# Altium PCB OTimCon_Station.PcbDoc
Units mm, origin at the board's own origin, x right, y up, seen from the top; angles counter-clockwise.
Board outline 76 x 51 mm, 2 copper layers (L1, L2), stack 1.688 mm thick; 55 components, 42 nets, 166 pads, 5 vias.
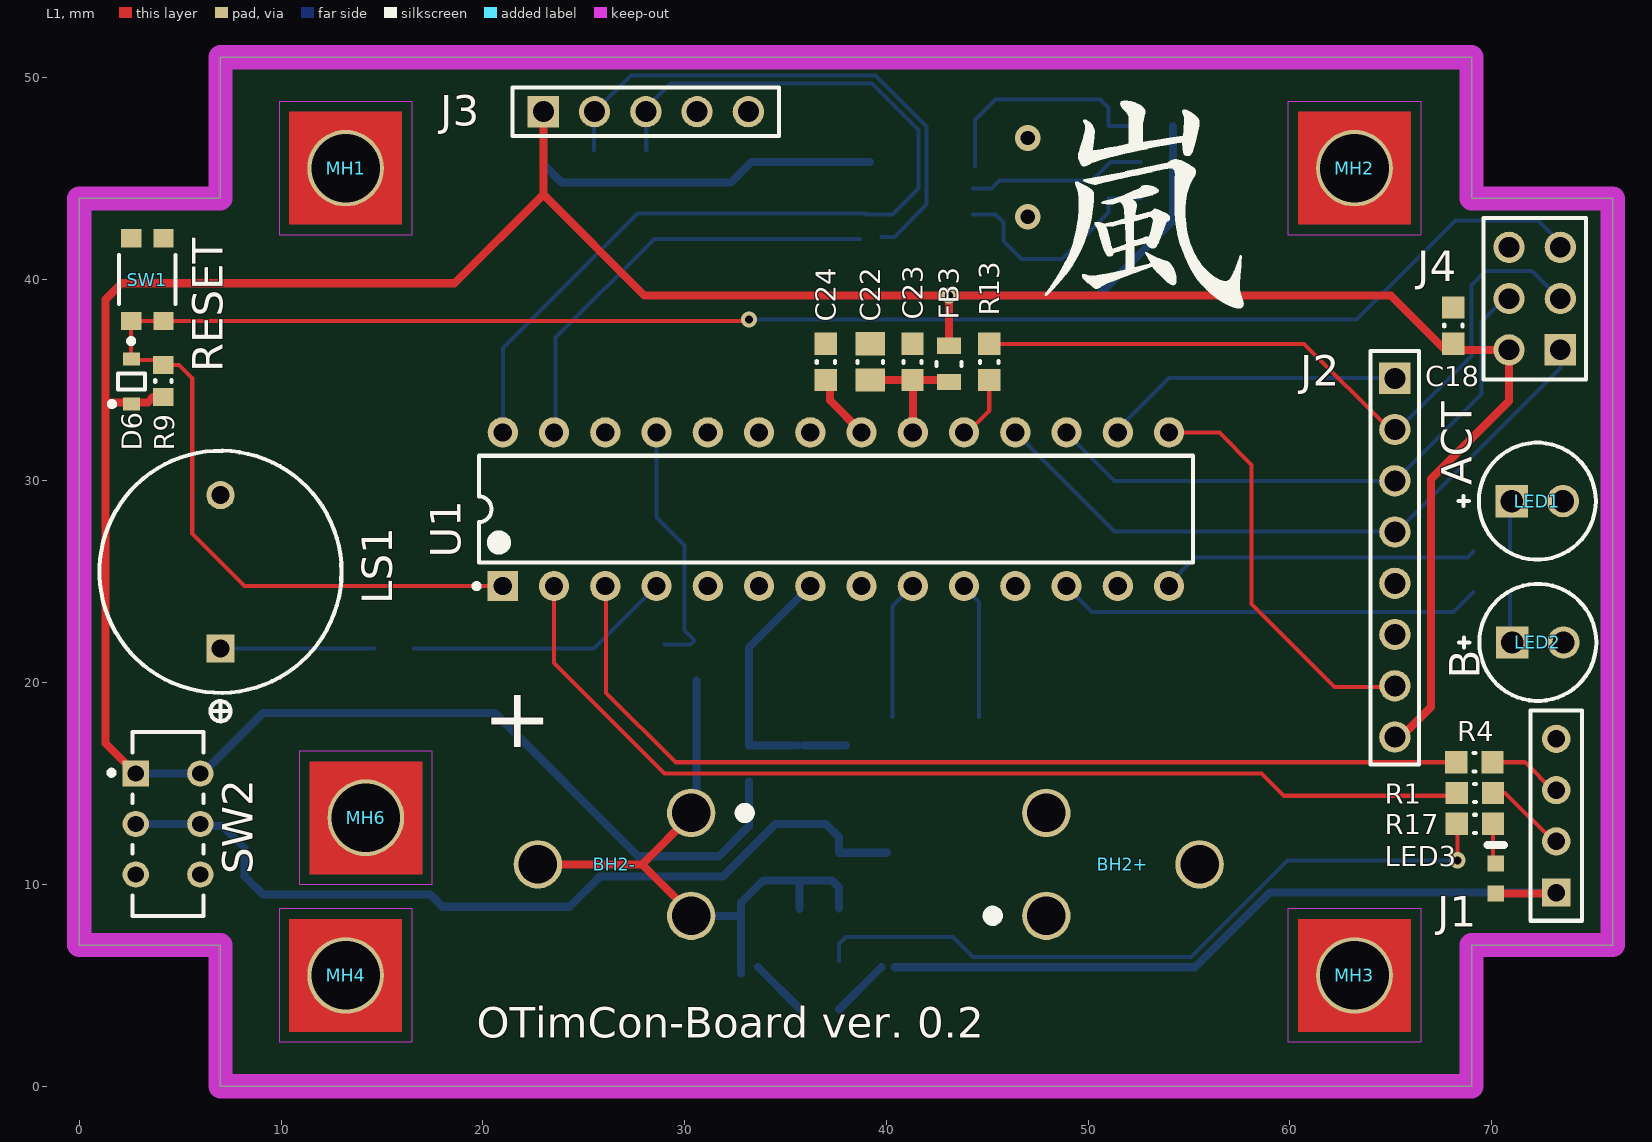
[diagram p0: L1 view]
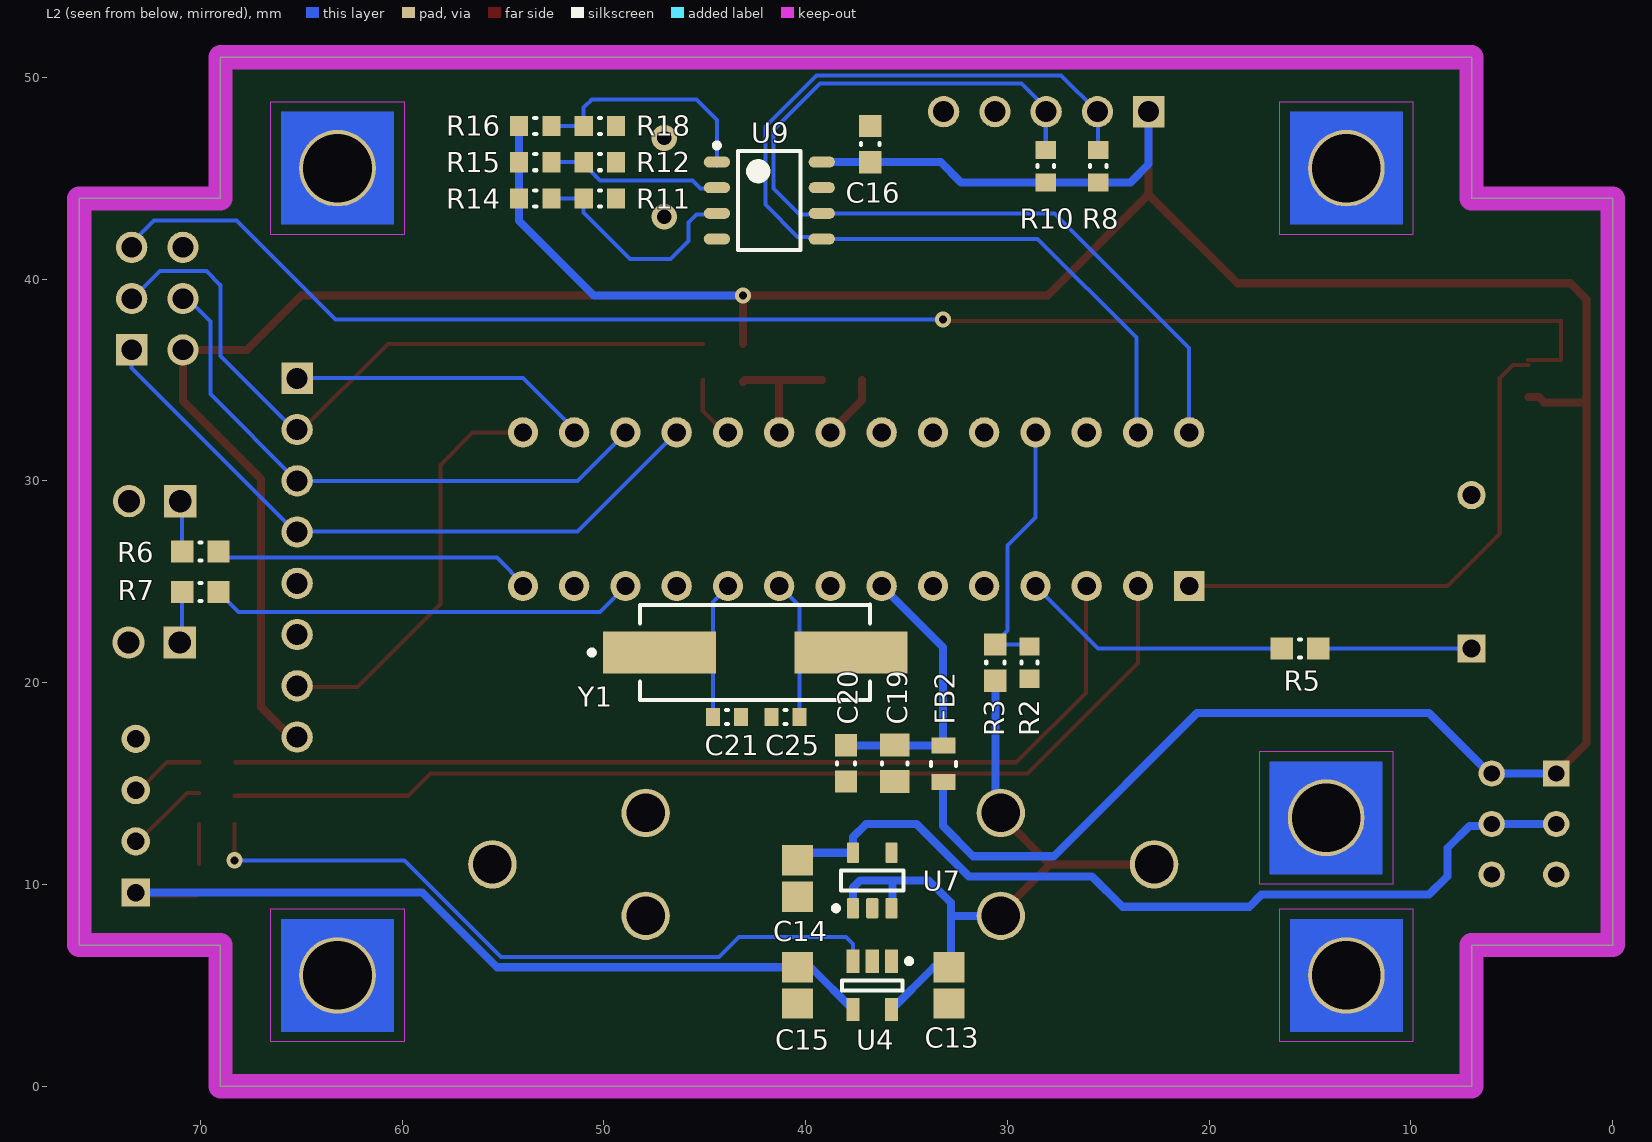
[diagram p1: L2 view, seen from below]

## Layer stack, top to bottom
Top Solder: solder mask 0.0102, Solder Resist, Dk 3.5
L1: signal copper 0.0442
Dielectric5: core 1.6, DE 104 ML, Dk 3.26
L2: signal copper 0.0442
Bottom Solder: solder mask 0.0102, Solder Resist, Dk 3.5

## Board outline
7,51 69,51 69,44 76,44 76,7 69,7 69,0 7,0 7,7 0,7 0,44 7,44

## Design rules (kind name [scope] priority, off if disabled: settings)
Clearance "Around polygons" [IsRegion] p1: gap=0.3 ignorepadtopadclearanceinfootprint=FALSE except(0: Arc-Hole Track-Hole SMDPad-Hole THPad-Hole Via-Hole Fill-Hole Poly-Hole Region-Hole Text-Hole)
Clearance [All] p2: gap=0.2 ignorepadtopadclearanceinfootprint=FALSE except(0: Arc-Hole Track-Hole SMDPad-Hole THPad-Hole Via-Hole Fill-Hole Poly-Hole Region-Hole Text-Hole)
ComponentClearance "MH2 to J2" [InComponent('MH2') vs InComponent('J2')] p1: gap=0 collisioncheckmode=3 verticalgap=0 showdistances=FALSE
ComponentClearance "DIP SOCKET to MH2 and U1" [InComponent('SCKT FOR U1') vs InComponent('MH2') or InComponent('U1')] p2: gap=0 collisioncheckmode=3 verticalgap=0 showdistances=FALSE
ComponentClearance "MH4 to FID4 and J4" [InComponent('MH4') vs InComponent('FID4') or InComponent('J4')] p3: gap=0 collisioncheckmode=3 verticalgap=0 showdistances=FALSE
ComponentClearance "Power Resistors" [InComponent('R27') vs InComponent('R28')] p4: gap=0 collisioncheckmode=3 verticalgap=0 showdistances=FALSE
ComponentClearance "SW2 and FID1" [InComponent('SW2') vs InComponent('FID1')] p5: gap=0 collisioncheckmode=3 verticalgap=0 showdistances=FALSE
ComponentClearance [All] p6: gap=0.2 collisioncheckmode=3 verticalgap=0.2 showdistances=FALSE
Height [All] p1: minheight=-8 maxheight=25.4 prefheight=12.7
HoleSize [All] p1: absolutevalues=TRUE maxlimit=10 minlimit=0.4 maxpercent=80.000 minpercent=20.000
HoleToHoleClearance [All] p1: gap=0.3 allowstackedmicrovias=TRUE
MinimumSolderMaskSliver [All] p1: minsoldermaskwidth=0.09
PlaneClearance [All] p1: clearance=0.3
PlaneConnect [All] p1: planeconnectstyle=Direct reliefexpansion=0.2 reliefentries=4 reliefconductorwidth=0.3 reliefairgap=0.2
PolygonConnect PolygonConnect_3 [All vs IsNamedPolygon('NONET_L01_P002')] p1: connectstyle=Relief reliefconductorwidth=0.254 reliefentries=4 polygonreliefangle="90 Angle" airgapwidth=0.254
PolygonConnect PolygonConnect_2 [All vs IsNamedPolygon('NONET_L02_P000')] p2: connectstyle=Relief reliefconductorwidth=0.254 reliefentries=4 polygonreliefangle="90 Angle" airgapwidth=0.254
PolygonConnect PolygonConnect_1 [All vs IsNamedPolygon('NONET_L01_P002')] p3: connectstyle=Relief reliefconductorwidth=0.254 reliefentries=4 polygonreliefangle="90 Angle" airgapwidth=0.254
PolygonConnect [All] p4: connectstyle=Direct reliefconductorwidth=0.254 reliefentries=4 polygonreliefangle="90 Angle" airgapwidth=0.254
RoutingTopology [All] p1: topology=Daisy_Balanced
RoutingVias [All] p1: holewidth=0.4 width=0.8 viastyle="Through Hole" minholewidth=0.4 minwidth=0.8 maxholewidth=0.4 maxwidth=0.8
SilkToSilkClearance [All] p1: silktosilkclearance=0.1
SilkToSolderMaskClearance SilkscreenOverComponentPads [IsPad] p1: minsilkscreentomaskgap=0.1 clearancetoexposedcopper=TRUE
SolderMaskExpansion [All] p1: expansion=0.1
Width "Width POWERS" [InNet('+*') or InNet('VPROG') or InNet('GND') or InNet('VBLION')] p1: maxlimit=4 minlimit=0.4 preferedwidth=0.4 minimp=50.000000 maximp=50.000000 favimp=50.000000
Width [All] p2: maxlimit=0.5 minlimit=0.2 preferedwidth=0.2 minimp=50.000000 maximp=50.000000 favimp=50.000000
20 further rules are at their usual default settings.

## Classes and differential pairs
differential pair class DIFF90: PCIE_RX PCIE_TX USB0 USB0_CON USB0_L USB1 USB1_CON USB1_L USB_MPCIE USB_MPCIE_CON USB_OTG USB_OTG_CON
differential pair class DIFF100: CSI_CLK0 CSI_D0 CSI_D1 HDMI_IN_CLK HDMI_IN_D0 HDMI_IN_D1 HDMI_IN_D2 HDMI_OUT_CLK HDMI_OUT_D0 HDMI_OUT_D1 HDMI_OUT_D2 MX0 MX1 MX2 MX3 PCIE_CLK SATA_RX SATA_TX TRD0 TRD1 TRD2 TRD3

## Components (designator, comment, footprint, x,y, rotation, side; value= is the part's Value field where it differs from the comment)
BH2+ "PCB_Clips_54" KEYSTONE-CLIPS_54-3_V 52.627,11 r90 top
BH2- "PCB_Clips_54" KEYSTONE-CLIPS_54-3_V 25.627,11 r270 top
C13 "CC0805KKX7R8BB105" CAPC2013X145X50ML20T25 32.9,5 r270 bottom
C14 "CC0805KKX7R8BB105" CAPC2013X145X50ML20T25 40.4,10.3 r270 bottom
C15 "CC0805KKX7R8BB105" CAPC2013X145X50ML20T25 40.4,5 r270 bottom
C16 "CAP 100nF 25V 0603(1608)" CAPC0603(1608)100_M 36.8,46.7 r270 bottom value=100nF
C18 "CAP 100nF 25V 0603(1608)" CAPC0603(1608)100_M 68.1,37.7 r270 top value=100nF
C19 "CAP 10uF 25V 0805(2012)" CAPC0805(2012)145_N 35.585,16.009 r90 bottom value=10uF
C20 "CAP 100nF 25V 0603(1608)" CAPC0603(1608)100_M 38,16 r90 bottom value=100nF
C21 "CAP 16pF 25V 0603(1608)" CAPC0603(1608)100_L 43.9,18.3 r0 bottom value=16pF
C22 "CAP 10uF 25V 0805(2012)" CAPC0805(2012)145_N 39.2,35.9 r270 top value=10uF
C23 "CAP 100nF 25V 0603(1608)" CAPC0603(1608)100_M 41.3,35.9 r270 top value=100nF
C24 "CAP 100nF 25V 0603(1608)" CAPC0603(1608)100_M 37,35.9 r270 top value=100nF
C25 "CAP 16pF 25V 0603(1608)" CAPC0603(1608)100_L 41,18.3 r180 bottom value=16pF
D6 "BAT54HT1G" ONSC-SOD-323-2-477-02_V 2.591,34.93 r90 top
FB2 "MPZ2012S601AT000" TDK-MPZ2012_V 33.172,15.983 r90 bottom
FB3 "MPZ2012S601AT000" TDK-MPZ2012_V 43.1,35.8 r270 top
J1 "SLW-104-01-F-S" SMTC-SLW-104-01-X-S 73.2,9.6 r90 top
J2 "SSW-108-01-G-S" SMTC-SSW-108-01-G-S 65.2,26.2 r270 top
J3 "SSW-105-01-L-S" SMTC-SSW-105-01-X-S 23,48.3 r0 top
J4 "TSW-103-08-F-D" SMTC-TSW-103-08-X-D 73.4,36.5 r90 top
LED1 "C503B-RAN-CY0B0AA2" CREE-C503B-RAN 72.263,29 r0 top
LED2 "C503B-RAN-CY0B0AA2" CREE-C503B-RAN 72.288,22 r0 top
LED3 "LTST-C190KFKT" LTST-C190KFKT_V 70.2,10.3 r90 top
LS1 "YMD-12095-G-6V" HKDZ-YMD-12095-G-2_V 7,25.5 r90 top
MH1 "Mounting Hole (Screw)" Mounting-Hole-Altium 13.2,45.5 r0 top
MH2 "Mounting Hole (Screw)" Mounting-Hole-Altium 63.2,45.5 r0 top
MH3 "Mounting Hole (Screw)" Mounting-Hole-Altium 63.2,5.5 r0 top
MH4 "Mounting Hole (Screw)" Mounting-Hole-Altium 13.2,5.5 r0 top
MH6 "Mounting Hole (Screw)" Mounting-Hole-Altium 14.2,13.31 r0 top
R1 "100R 1% 0603(1608)" RESC0603(1608)_M 69.172,14.534 r180 top value="100.00 Ohm"
R2 "10K 1% 0603(1608)" RESC0603(1608)_N 28.9,21 r90 bottom value="10000.00 Ohm"
R3 "40K2 1% 0603(1608)" RESC0603(1608)_M 30.6,21 r270 bottom value="40200.00 Ohm"
R4 "100R 1% 0603(1608)" RESC0603(1608)_M 69.147,16.061 r180 top value="100.00 Ohm"
R5 "100R 1% 0603(1608)" RESC0603(1608)_M 15.5,21.7 r0 bottom value="100.00 Ohm"
R6 "1K 1% 0603(1608)" RESC0603(1608)_M 70,26.5 r0 bottom value="1000.00 Ohm"
R7 "100R 1% 0603(1608)" RESC0603(1608)_M 70,24.5 r180 bottom value="100.00 Ohm"
R8 "10K 1% 0603(1608)" RESC0603(1608)_N 25.5,45.6 r90 bottom value="10000.00 Ohm"
R9 "10K 1% 0603(1608)" RESC0603(1608)_N 4.166,34.955 r90 top value="10000.00 Ohm"
R10 "10K 1% 0603(1608)" RESC0603(1608)_N 28.1,45.6 r90 bottom value="10000.00 Ohm"
R11 "10K 1% 0603(1608)" RESC0603(1608)_N 50.2,44 r180 bottom value=10k
R12 "10K 1% 0603(1608)" RESC0603(1608)_N 50.2,45.8 r0 bottom value=10k
R13 "22R 1% 0603(1608)" RESC0603(1608)_M 45.1,35.9 r90 top value="22.00 Ohm"
R14 "10K 1% 0603(1608)" RESC0603(1608)_N 53.4,44 r0 bottom value=10k
R15 "10K 1% 0603(1608)" RESC0603(1608)_N 53.4,45.8 r180 bottom value=10k
R16 "10K 1% 0603(1608)" RESC0603(1608)_N 53.4,47.6 r0 bottom value=10k
R17 "1K 1% 0603(1608)" RESC0603(1608)_M 69.172,13.008 r180 top value="1000.00 Ohm"
R18 "10K 1% 0603(1608)" RESC0603(1608)_N 50.2,47.6 r180 bottom value=10k
SW1 "KMR231GLFS" CKCP-KMR231GLFS 3.373,39.981 r90 top
SW2 "MS-22D18G2ROHS" DYL-MS22D18G2ROHS-6_V 4.4,13 r0 top
U1 "ATmega328P-PU" 28P3 37.5,28.6 r90 top
U4 "MAX1555EZK+" MAXM-Z5+1_M 36.7,5 r270 bottom
U7 "TPS73233DBVT" DBV0005A_N 36.7,10.2 r90 bottom
U9 "AT24C32E-SSHM-T" ATML-8S1_A_L 41.8,43.9 r180 bottom
Y1 "ABLS-11.0592MHZ-B2-T" ABRA-ABLS-11.0592MHZ-B2-T_V 42.5,21.5 r180 bottom

## Footprints (in the part's own frame and the unit in brackets; to place one, negate y for a bottom-side part, rotate by r counter-clockwise, add the part's x,y. Pads: shape width x height; smd on the part's side, far side on the other; paste and mask are expansions set on the pad)
28P3 [mm] "28-Pin Plastic Dual In-Line Package (PDIP)"
  rect 1.5x1.5 hole 0.9: 1(-3.81,16.51)
  round 1.5 hole 0.9: 2(-3.81,13.97) 3(-3.81,11.43) 4(-3.81,8.89) 5(-3.81,6.35) 6(-3.81,3.81) 7(-3.81,1.27) 8(-3.81,-1.27) 9(-3.81,-3.81) 10(-3.81,-6.35) 11(-3.81,-8.89) 12(-3.81,-11.43) 13(-3.81,-13.97) 14(-3.81,-16.51) 15(3.81,-16.51) 16(3.81,-13.97) 17(3.81,-11.43) 18(3.81,-8.89) 19(3.81,-6.35) 20(3.81,-3.81) 21(3.81,-1.27) 22(3.81,1.27) 23(3.81,3.81) 24(3.81,6.35) 25(3.81,8.89) 26(3.81,11.43) 27(3.81,13.97) 28(3.81,16.51)
  silkscreen extent -3.93,-17.7 2.65,17.93, body extent -3.6,-17.65 3.6,17.65, height 4.58
ABRA-ABLS-11.0592MHZ-B2-T_V [mm] "SMD, 2-Leads, Body 11.4x4.7mm"
  rect 5.6x2.1 smd: 1(-4.75,0) 2(4.75,0)
  silkscreen extent -8.23,-2.35 5.7,2.37, body extent -5.7,-2.35 5.7,2.35, height 4.2
ATML-8S1_A_L [mm] "SOIC, 8-Leads, Body 3.9x4.9mm, Pitch 1.27mm, IPC High Density"
  oval 1.3x0.55 smd: 1(-2.6,1.905) 2(-2.6,0.635) 3(-2.6,-0.635) 4(-2.6,-1.905) 5(2.6,-1.905) 6(2.6,-0.635) 7(2.6,0.635) 8(2.6,1.905)
  silkscreen extent -2.73,-2.45 1.55,2.85, body extent -1.95,-2.45 1.95,2.45, height 1.75
CAPC0603(1608)100_L [mm] "Chip Capacitor, Body 1.6x0.8mm, Height 1.0mm, IPC High Density"
  rect 0.7x0.9 smd: 1(-0.7,0) 2(0.7,0)
  silkscreen extent -0.05,-0.35 0.05,0.35, body extent -0.87,-0.47 0.88,0.48, height 1
CAPC0603(1608)100_M [mm] "Chip Capacitor, Body 1.6x0.8mm, Height 1.0mm, IPC Low Density"
  rect 1.1x1.1 smd: 1(-0.9,0) 2(0.9,0)
  silkscreen extent -0.05,-0.45 0.05,0.45, body extent -0.87,-0.47 0.88,0.48, height 1
CAPC0805(2012)145_N [mm] "Chip Capacitor, Body 2.0x1.2mm, Height 1.45mm, IPC Medium Density"
  rect 1.15x1.45 smd: 1(-0.9,0) 2(0.9,0)
  silkscreen extent -0.05,-0.62 0.05,0.63, body extent -1.1,-0.72 1.1,0.73, height 1.45
CAPC2013X145X50ML20T25 [mm] "Chip Capacitor, 2-Leads, Body 2.00x1.25mm, IPC Low Density"
  rect 1.5x1.55 smd: 1(-0.9,0) 2(0.9,0)
  body extent -1.1,-0.72 1.1,0.72, height 1.45
CKCP-KMR231GLFS [mm] "SMD, 4-Leads, Body 4.6x2.8mm"
  rect 0.9x1 smd: 1(-2.05,0.8) 2(-2.05,-0.8) 3(2.05,0.8) 4(2.05,-0.8)
  silkscreen extent -3.17,-1.4 1.21,1.4, body extent -2.3,-1.4 2.3,1.4, height 1.92
CREE-C503B-RAN [mm] "THD, 2-Leads, Dia 5.8mm, Pitch 2.54mm"
  rect 1.6x1.6 hole 1.1: 1(-1.27,0)
  round 1.6 hole 1.1: 2(1.27,0)
  silkscreen extent -3.9,-2.9 2.9,2.9
DBV0005A_N [mm] "SOT23, 5-Leads, Body 3.05x1.75mm, Pitch 0.95mm, IPC Medium Density"
  rrect17% 1x0.6 smd: 1(-1.375,0.95) 2(-1.375,0) 3(-1.375,-0.95) 4(1.375,-0.95) 5(1.375,0.95)
  silkscreen extent -1.5,-1.55 0.5,1.93, body extent -1.42,-1.46 1.42,1.46, height 1.08
DYL-MS22D18G2ROHS-6_V [mm] "TH, 6-Leads, Body 3.5x9.1mm, Pitch 2.5mm"
  rect 1.3x1.3 hole 0.8: 1(-1.6,2.5)
  round 1.3 hole 0.8: 2(-1.6,0) 3(-1.6,-2.5) 4(1.6,-2.5) 5(1.6,0) 6(1.6,2.5)
  silkscreen extent -2.92,-4.55 1.75,4.55, body extent -1.75,-4.55 1.75,4.55, height 5.2
HKDZ-YMD-12095-G-2_V [mm] "Buzzer, 2-Leads, Dia 12mm, Height 10mm"
  rect 1.4x1.4 hole 0.9: 1(-3.8,0)
  round 1.4 hole 0.9: 2(3.8,0)
  Mechanical 13 keep-out circle w0.1: c0,0 r6
  silkscreen extent -7.41,-6 6,6, body extent -6,-6 6,6, height 10
KEYSTONE-CLIPS_54-3_V [mm] "3-Pin Hand Drawn, Body 18.102x13.004mm"
  round 2.4 hole 1.9: 1(-2.55,4.702) 2(2.55,4.702) 3(0,-2.898)
  silkscreen extent -2.8,7.1 -2.3,7.6, body extent -9.05,-6.5 9.05,6.5, height 18
LTST-C190KFKT_V [mm] "SMD, 2-Leads, Body 1.6x0.8mm"
  rect 0.8x0.8 smd: 1(-0.75,0) 2(0.75,0)
  silkscreen extent 1.65,-0.4 1.65,0.4, body extent -0.8,-0.4 0.8,0.4, height 0.9
MAXM-Z5+1_M [mm] "SOT23, 5-Leads, Body 3x1.65mm, Pitch 0.95mm, IPC Low Density"
  rect 1.15x0.65 smd: 1(-1.2,0.95) 2(-1.2,0) 3(-1.2,-0.95) 4(1.2,-0.95) 5(1.2,0.95)
  silkscreen extent -1.32,-1.5 0.25,1.95, body extent -0.82,-1.5 0.82,1.5, height 1.1
Mounting-Hole-Altium [mm] "Mounting Hole, Altium, 3.8mm pad, 3.4mm plated hole"
  round 3.8 hole 3.4 mask+0.038: MOUNT(0,0)
  L1 region: -2.8,-2.801 2.8,-2.801 2.8,2.799 -2.8,2.799
  L1 keep-out region: -3.3,-3.299 3.3,-3.299 3.3,3.301 -3.3,3.301
  L2 region: -2.8,-2.801 2.8,-2.801 2.8,2.799 -2.8,2.799
  L2 keep-out region: -3.3,-3.299 3.3,-3.299 3.3,3.301 -3.3,3.301
ONSC-SOD-323-2-477-02_V [mm] "SOD, 2-Leads, Body 1.7x1.25mm"
  rect 0.63x0.83 smd: 1(-1.115,0) 2(1.115,0)
  silkscreen extent -1.24,-0.67 0.4,1.09, body extent -0.85,-0.63 0.85,0.63, height 1.06
RESC0603(1608)_M [mm] "Chip Resistor, Body 1.6x0.8mm, IPC Low Density"
  rect 1.1x1.1 smd: 1(-0.9,0) 2(0.9,0)
  silkscreen extent -0.05,-0.45 0.05,0.45, body extent -0.85,-0.47 0.85,0.47, height 0.6
RESC0603(1608)_N [mm] "Chip Resistor, Body 1.6x0.8mm, IPC Medium Density"
  rect 0.9x1 smd: 1(-0.8,0) 2(0.8,0)
  silkscreen extent -0.05,-0.4 0.05,0.4, body extent -0.85,-0.47 0.85,0.47, height 0.6
SMTC-SLW-104-01-X-S [mm] "Low Profile Socket Strip, 1x4 Pins, Vertical, 2.54mm Pitch, Female"
  rect 1.4x1.4 hole 0.86: 1(0,0)
  round 1.4 hole 0.86: 2(2.54,0) 3(5.08,0) 4(7.62,0)
  silkscreen extent -1.4,-1.27 9.02,1.27, body extent -1.27,-1.27 8.89,1.27, height 4.57
SMTC-SSW-105-01-X-S [mm] "SQ Post Socket, 1x5 Pins, Vertical, 2.54mm Pitch, Female"
  rect 1.55x1.55 hole 1.04: 1(0,0)
  round 1.55 hole 1.04: 2(2.54,0) 3(5.08,0) 4(7.62,0) 5(10.16,0)
  silkscreen extent -1.53,-1.2 11.69,1.2, body extent -1.52,-1.21 11.68,1.21, height 8.51
SMTC-SSW-108-01-G-S [mm] "SQ Post Socket, 1x8 Pins, Vertical, 2.54mm Pitch, Female"
  rect 1.55x1.55 hole 1.04: 1(-8.89,0)
  round 1.55 hole 1.04: 2(-6.35,0) 3(-3.81,0) 4(-1.27,0) 5(1.27,0) 6(3.81,0) 7(6.35,0) 8(8.89,0)
  silkscreen extent -10.25,-1.21 10.25,1.2, body extent -10.4,-1.21 10.42,1.21, height 8.51
SMTC-TSW-103-08-X-D [mm] ".025 SQ Post Terminal Strip Assembly, 2x3 Pins, Vertical, 2.54mm Pitch, Male"
  rect 1.55x1.55 hole 1.02: 1(0,0)
  round 1.55 hole 1.02: 2(0,2.54) 3(2.54,0) 4(2.54,2.54) 5(5.08,0) 6(5.08,2.54)
  silkscreen extent -1.46,-1.27 6.54,3.81, body extent -1.27,-1.27 6.35,3.81, height 8.38
TDK-MPZ2012_V [mm] "SMD, 2-Leads, Body 2x1.25mm"
  rect 0.8x1.2 smd: 1(-0.9,0) 2(0.9,0)
  silkscreen extent -0.1,-0.63 0.1,0.63, body extent -1,-0.63 1,0.63, height 1.05

## Part data
BH2+ BH2-: library part CMP-0466-00001-2, "PC Battery Clip, Catalog No.54, Spring Steel, Body 18.102 x 13.004 mm, THM", Manufacturer=Keystone, # of Cells=1, Cell Size=18650, ComponentLink1Description="Manufacturer URL", ComponentLink1URL=http://www.keyelco.com/, ComponentLink2Description=Datasheet, ComponentLink2URL=http://www.keyelco.com/userAssets/file/M60-2p9.pdf, Finish/Plating=Tin-Nickel, Material="Spring Steel", Mounting Technology="Through Hole", PackageDescription="3-Pin Hand Drawn, Body 18.102 x 13.004 mm", PackageReference=KEYSTONE-CLIPS_54-3, PartNumber=PCB_Clips_54, Type=CLIP
C13 C14 C15: library part CMP-2100-03605-1, "Chip Capacitor, 1 uF, 25 V, 10%, -55 to 125 degC, 0805 (2012 Metric), RoHS, Tape and Reel", Capacitance=1uF, Case/Package=0805, Case Code (Metric)=2012, Dielectric=X7R, Manufacturer=Yageo, Max Operating Temperature=125degC, Min Operating Temperature=-55degC, Package Description="2-Pin Surface Mount Device, Body 2 x 1.25 mm", Package Quantity=3000, Tolerance=10%, Voltage Rating=25V, Case Code (Imperial)=0805, Composition=Ceramic, Datasheet URL=http://www.yageo.com/documents/recent/UPY-GPHC_X7R_6.3V-to-50V_15.pdf, Datasheet Version="Rev. 15, 10/2016", Depth=1.25mm, Dissipation Factor=5%, Height=1.25mm, Lead Free=LeadFree, Length=2mm, Manufacturer URL=http://www.yageo.com/, Mount=SurfaceMount, Number of Pins=2, Package Reference=0805, Packaging=TapeandReel, Radiation Hardening=No, REACH SVHC=NoSVHC, RoHSCompliant=True, Termination=SMD/SMT, Thickness=0.057inch, Voltage Rating (DC)=25V, Width=0.049inch
C16 C18 C20 C23 C24: library part CMP-1035-02588-1, "CAP 100nF 25V ±10% 0603 (1608 Metric) Thickness 1mm SMD", Case-EIA=0603, Case-Metric=1608, Rated Voltage="25 V", Tolerance=±10%, Max Thickness="1 mm", Technology=SMT
C19 C22: library part CMP-1036-04932-1, "CAP 10uF 25V ±10% 0805 (2012 Metric) Thickness 1.45mm SMD", Case-EIA=0805, Case-Metric=2012, Rated Voltage="25 V", Tolerance=±10%, Max Thickness="1.45 mm", Technology=SMT
C21 C25: library part CMP-1035-00712-1, "CAP 16pF 25V ±10% 0603 (1608 Metric) Thickness 1mm SMD", Case-EIA=0603, Case-Metric=1608, Rated Voltage="25 V", Tolerance=±10%, Max Thickness="1 mm", Technology=SMT
D6: library part CMP-1055-00462-1, "Schottky Barrier Diode, 2-Pin SOD-323, Pb-Free, Tape and Reel", Manufacturer="On Semiconductor", ComponentLink1Description="Manufacturer URL", ComponentLink1URL=http://www.onsemi.com/, ComponentLink2Description=Datasheet, ComponentLink2URL=http://www.onsemi.cn/pub_link/Collateral/BAT54HT1-D.PDF, ComponentLink3Description="Package Specification", ComponentLink3URL=http://www.onsemi.com/pub_link/Collateral/477-02.PDF.1, Configuration=Single, DatasheetVersion="Rev. 6", IFSM Max (A)=0.6, Mounting Technology="Surface Mount", PackageDescription="2-Pin SOD, Body 1.7 x 1.25 mm", PackageReference=SOD-323-2-477-02, PackageVersion="Rev. H, 03/2007", Packing="Tape and Reel", PartNumber=BAT54HT1G, RoHS=TRUE, trr Max (ns)=5
FB2 FB3: library part CMP-2000-05401-1, "Chip Bead, 0.1 Ohm, 2 A, -55 to 125 degC, 2-Pin SMD (0805), RoHS, Tape and Reel", Current Rating=2A, DC Resistance (DCR)=100mOhmMax, Impedance @ Frequency=600Ohm@100MHz, Manufacturer=TDK, Package / Case=0805(2012Metric), Package Description="2-Pin Surface Mount Device, Body 2 x 1.25 mm", Package Reference=805, PCN Part Number=MMZ,MPSSeriesOct/2014, Standard Package=1, Catalog Drawings="(MMZ,MPZ)2012SeriesTop /  / (MMZ,MPZ)2012SeriesFootprint /  / (MMZ,MPZ)2012SeriesSide", Category=Filters, Datasheet URL=http://datasheet.octopart.com/MPZ2012S601AT000-TDK-datasheet-12512619.pdf, Datasheet Version=Sep-12, Family=FerriteBeadsandChips, Filter Type=DifferentialMode-Single, Height (Max)="0.041\"(1.05mm)", Manufacturer URL=http://www.tdk.com/, Mounting Type=SurfaceMount, Online Catalog=MPZ2012Series, Other Names=445-2206-6, Packaging=Digi-Reel, Product Training Modules=EMCComponents, Series=MPZ, Size / Dimension="0.079\"Lx0.049\"W(2.00mmx1.25mm)"
J1: library part CMP-1023-00132-1, "Low Profile Socket Strips, Through-hole, Vertical, -55 to 125 degC, 2.54 mm Pitch, 4-Pin, Female, RoHS", Manufacturer=Samtec, Temperature Range="-55 to 125 degC", ComponentLink1Description="Manufacturer URL", ComponentLink1URL=http://www.samtec.com, ComponentLink2Description=Datasheet, ComponentLink2URL=http://www.samtec.com/documents/webfiles/pdf/SLW.PDF, ComponentLink3Description="Package Specification", ComponentLink3URL=http://www.samtec.com/documents/webfiles/cpdf/SLW-1XX-01-X-X-MKT.pdf, DatasheetVersion=F-214, Mounting Technology=Through-hole, Orientation=Vertical, PackageDescription="Low Profile Socket Strip", PackageReference=SLW-104-01-X-S, PackageVersion="X, 9/1987", PartNumber=SLW-104-01-F-S, Pitch="2.54 mm", RoHS=True
J2: library part CMP-1272-00001-1, "SOCKET, Through-hole, Vertical, -55 to 125 degC, 2.54 mm Pitch, 8-Pin Female, RoHS", Manufacturer=Samtec, Operating Temperature Range="-55 to 125 degC", ComponentLink1Description="Manufacturer URL", ComponentLink1URL=http://www.samtec.com/, ComponentLink2Description=Datasheet, ComponentLink2URL=http://www.samtec.com/documents/webfiles/cpdf/SSW-1XX-XX-XXX-X-XX-XXX-XX-MKT.pdf, ComponentLink3Description="Package Specification", ComponentLink3URL=http://www.samtec.com/documents/webfiles/cpdf/SSW-S.PDF, Contact Finish=Gold, Contact Type="Female Socket", DatasheetVersion="Rev. CA", Mounting Technology="Through Hole", Number of Positions=8, Number of Rows=1, Orientation=Vertical, PackageDescription="1x8 Pins SQ Post Socket, Vertical, Body 20.5 x 2.41 mm, Pitch 2.54 mm, Female", PackageVersion="Rev. A", Packing=Bulk, PartNumber=SSW-108-01-G-S, Pitch="2.54 mm", RoHS=TRUE, Termination=Through-hole
J3: library part CMP-1023-00347-1, "SQ Post Socket, Through-hole, Vertical, -55 to 125 degC, 2.54mm Pitch, 5-Pin, Female, RoHS", Manufacturer=Samtec, Temperature Range="-55 to 125 degC", ComponentLink1Description="Manufacturer URL", ComponentLink1URL=http://www.samtec.com, ComponentLink2Description=Datasheet, ComponentLink2URL=http://www.samtec.com/documents/webfiles/pdf/SSW_TH.PDF, ComponentLink3Description="Package Specification", ComponentLink3URL=http://www.samtec.com/documents/webfiles/cpdf/SSW-1XX-XX-XXX-X-XX-XXX-XX-MKT.pdf, DatasheetVersion=F-214, Mounting Technology=Through-hole, Orientation=Vertical, PackageDescription="Assembly, Socket Strip .016 X .031 Tail", PackageReference=SSW-105-01-X-S, PackageVersion="CA, 6/1987", PartNumber=SSW-105-01-L-S, Pitch="2.54 mm", RoHS=True
J4: library part CMP-1024-00337-1, "0.025\" SQ Post Header, Through-hole, Vertical, -55 to 125 degC, 2.54 mm Pitch, 6-Pin, Male, RoHS", Manufacturer=Samtec, Temperature Range="-55 to 125 degC", ComponentLink1Description="Manufacturer URL", ComponentLink1URL=http://www.samtec.com, ComponentLink2Description=Datasheet, ComponentLink2URL=http://www.samtec.com/documents/webfiles/pdf/TSW_TH.PDF, ComponentLink3Description="Package Specification", ComponentLink3URL=http://www.samtec.com/documents/webfiles/cpdf/TSW-XXX-XX-XXX-X-XX-XXX-MKT.pdf, DatasheetVersion=F-214, Mounting Technology=Through-hole, Orientation=Vertical, PackageDescription=".025[0.64] SQ. Post Terminal Strip Assembly", PackageReference=TSW-103-08-X-D, PackageVersion="DM, 8/1988", PartNumber=TSW-103-08-F-D, Pitch="2.54 mm", RoHS=True
LED1 LED2: library part CMP-2000-06058-1, "Cree(R) 5-mm Red Round LED, 2.1 V, -40 to 100 degC, 2-Pin THD, RoHS, Ammo", Emitting Color=Red, Forward Current=50mA, Forward Voltage=2.6V, Manufacturer=Cree, Operating Temperature Classification=Industrial, Operating Temp Range=-40Cto100C, Package Description="2-Pin Through Hole Device, Dia 5.8 mm, Pitch 2.54 mm", Package Reference=C503B-RAN, Package Type=T-13/4, Power Dissipation=130mW, Reverse Voltage=5V, Test Current (It)=20mA, Datasheet URL=http://www.cree.com/sitecore-modules/web/~/media/Files/Cree/LED-Components-and-Modules/HB/Data-Sheets/C503B-RAS-RAN-AAS-AAN-RBS-RBN-ABS-ABN-RCS-RCN-ACS-ACN-1079.pdf, Datasheet Version=12/2014, Dominant Wave Length=624nm, Lens Dimensions=5x5x7.8mm, Luminous Intensity=12000mcd, Main Category=StandardLED, Manufacturer URL=http://www.cree.com/, Mounting=ThroughHole, Mounting Technology=ThroughHole, Number of  Elements=1, Packaging=AmmoPack, Pin Count=2, Product Depth (mm)=5.8mm, Product Height (mm)=8.8mm, Product Length (mm)=5.8mm, Shape Type=Circular, Type=Uni-Color, Viewing Angle=15°
LED3: library part CMP-1674-00008-1, "LED Uni-Color Orange, 75 mW, 30 mA, -35 to 85 degC, 2-Pin SMD, RoHS, Tape and Reel", Case\Package=0603, Case Code (Metric)=1608, Max Operating Temperature="155 degC", Min Operating Temperature="-55 degC", Package Quantity=5000, Power Rating="100 mW", Resistance="47 kohm", Tolerance=1%, Voltage Rating="50 V", Case Code (Imperial)=0603, ComponentLink1Description="Manufacturer URL", ComponentLink1URL=http://www.us.liteon.com/, ComponentLink2Description=Datasheet, ComponentLink2URL=http://optoelectronics.liteon.com/upload/download/DS-22-99-0186/S_110_LTST-C190KFKT.pdf, DatasheetVersion="Rev. I, 09/2011", Height="0.45 mm", Length="1.6 mm", Mount="Surface Mount", PackageDescription="2-Pin Surface Mount Device, Body 1.6 x 0.8 mm", PackageReference=C190KFKT, Packaging="Tape and Reel", Pins=2, REACH SVHC="No SVHC", RoHSCompliant=true, Voltage Rating (DC)="50 V", Width="0.8 mm"
LS1: library part CMP-0912-00001-1, "Electromagnetic Active Buzzer, 6 V, 32 mA, -20 to 45 degC, 2-Pin THD, RoHS", Manufacturer="Huakai Electronic", Operating Temperature="-20 to 45 degC", Operating Voltage="4 to 8 V", Rated Current="<=32 mA", Rated Voltage="6 V", Resonant Freq="2300 +/- 300 Hz", ComponentLink1Description="Manufacturer URL", ComponentLink1URL=http://www.xhhkdz.com/, ComponentLink2Description=Datasheet, ComponentLink2URL=http://www.xhhkdz.com/product/?103_688.html, ComponentLink3Description="URL Link1", ComponentLink3URL="a°�eL…a•°a?®i1š http://www.hongyan-e.com/web/fmq011.htm", Mounting Technology="Through Hole", PackageDescription="2-Pin THD, Dia 12 mm, Height 10 mm", PackageReference=YMD-12095-G-2, PartNumber=YMD-12095-G-6V, RoHS=TRUE, Soud Output=">=85 dB"
MH1 MH2 MH3 MH4 MH6: library part Mounting-Hole-Screw, "Mounting Hole, M3 Screw"
R1 R4 R5 R7: library part CMP-1012-00397-1, "100R 0.1W 1% 0603 (1608 Metric)  SMD", Case-EIA=0603, Case-Metric=1608, Power="0.1 W", Tolerance="1 %", Technology=SMT
R2 R8 R9 R10 R11 R12 R14 R15 R16 R18: library part CMP-1012-00623-1, "10K 0.1W 1% 0603 (1608 Metric)  SMD", Case-EIA=0603, Case-Metric=1608, Power="0.1 W", Tolerance="1 %", Technology=SMT
R3: library part CMP-1012-00691-1, "40K2 0.1W 1% 0603 (1608 Metric)  SMD", Case-EIA=0603, Case-Metric=1608, Power="0.1 W", Tolerance="1 %", Technology=SMT
R6 R17: library part CMP-1012-00510-1, "1K 0.1W 1% 0603 (1608 Metric)  SMD", Case-EIA=0603, Case-Metric=1608, Power="0.1 W", Tolerance="1 %", Technology=SMT
R13: library part CMP-1012-00320-1, "22R 0.1W 1% 0603 (1608 Metric)  SMD", Case-EIA=0603, Case-Metric=1608, Power="0.1 W", Tolerance="1 %", Technology=SMT
SW1: library part CMP-2000-06516-1, "Switch Tactile, SPST, 50 mA, 32 V, -40 to 85 degC, 4-Pin SMD, RoHS, Tape and Reel", Actuator Color=N/A, Contact Rating @ Voltage=1A, Dielectric Strength=>=250Vrms, Manufacturer="C&K Components", Maximum DC Voltage Rating=32V, Minimum Insulation Resistance=>=1000MOhm, Operating Force=3N, Operating Temperature=-40to85C, Package Description="4-Pin Surface Mount Device, Body 4.6 x 2.8 mm", Actuator Length=0.5mm, Actuator Style=Button, Base Material=N/A, Body Orientation=Straight, Contact Material=Silver, Contact Plating=Silver, Datasheet URL=http://www.ck-components.com/media/1479/kmr2.pdf, Datasheet Version=06/2016, Dimension=2.8x4.6x1.9mm, ECCN=EAR99, Electrical Life=N/A, Family=KMR2, Ground Terminal=Yes, Housing Material=N/A, HTS=8536501199, Illumination Type=N/R, Manufacturer URL=http://www.ckswitches.com/, Maximum AC Voltage Rating=N/A, Mechanical Life=150000Cycles, Mounting=SurfaceMount,GullWing, Mounting Technology=SurfaceMount, Package Reference=KMR231GLFS, Packaging=TapeandReel, Part No=KMR231GLFS, Pole Throw Configuration=SPST, Product Weight=N/A, RoHS=Yes, Seal Description=N/A, Seal Location=N/A, Supplier=C&KComponents, Switch Configuration=N.O., Type=Micro-Miniature
SW2: library part CMP-2100-03658-1, "Slide Switch, 30 V, 0.3 A, -20 to 80 degC, 6-Pin THD, RoHS", Manufacturer=Deyilong, Package Description="6-Pin Through Hole Device, Body 3.5 x 9.1 mm, Pitch 2.5 mm", Package Reference=MS22D18G2ROHS, Datasheet URL=http://datasheet.octopart.com/MS-22D18-G2-ROHS-Deyilong-datasheet-62330931.pdf, Datasheet Version=41091.0, Manufacturer URL=https://dgsdyn.cn.china.cn/
U1: library part CMP-0095-00013-2, "8-bit AVR Microcontroller, 32KB Flash, 1KB EEPROM, 2KB SRAM, 28-pin PDIP, Industrial Grade (-40°C to 85°C)", ComponentLink1Description="Manufacturer URL", ComponentLink1URL=http://www.atmel.com/, ComponentLink2Description="ATmega48A/48PA/88A/88PA/168A/168PA/328/328P Datasheet", ComponentLink2URL=http://www.atmel.com/dyn/resources/prod_documents/8271.pdf, ComponentLink3Description="ATmega48A/48PA/88A/88PA/168A/168PA/328/328P Summary", ComponentLink3URL=http://www.atmel.com/dyn/resources/prod_documents/8271S.pdf, DatasheetVersion="revD, May-2011", PackageDescription="28-lead (0.300\"/7.62mm Wide) Plastic Dual Inline Package (PDIP)", PackageReference=28P3, PackageVersion="revB, Sep-2001", RevisionNote="DatasheetVersion updated. URLs added."
U4: library part CMP-0246-00651-1, "Dual-Input USB/AC Adapter 1-Cell Li+ Battery Charger, 4.2 V Charger Voltage, 0.28 A DC Charging Current, 5-Pin TSOT Package, RoHS", Manufacturer=Maxim, Operating Temperature Range="-40 to 85 degC", Package=TSOT, Charger (V)=4.2, ComponentLink1Description="Manufacturer URL", ComponentLink1URL=http://www.maximintegrated.com/, ComponentLink2Description=Datasheet, ComponentLink2URL=http://datasheets.maximintegrated.com/en/ds/MAX1551-MAX1555.pdf, ComponentLink3Description="Package Specification", ComponentLink3URL=http://pdfserv.maximintegrated.com/package_dwgs/21-0113.PDF, DatasheetVersion="Rev. 0", ICHG Typ="0.28 A", Lithium Ion Cells=1, Max Charging VIN (V)=7, Max Protected VIN (V)=7, Mounting Technology="Surface Mount", PackageDescription="5-Pin Thin SOT23, Body 2.9 x 1.6 mm, Pitch 0.95 mm", PackageReference=Z5+1, PackageVersion="Rev. D", PartNumber=MAX1555EZK+, RoHS=TRUE
U7: library part CMP-0394-00348-2, "Single Output Fast Transient Response LDO, 200 mA, Fixed 3.3 V Output, 1.7 to 5.5 V Input, with Reverse Current Protection, 5-pin SOT-23 (DBV), -40 to 85 degC, Green (RoHS & no Sb/Br)", Manufacturer="Texas Instruments", Accuracy(%)=1, Code_JEDEC=MO-178, ComponentLink1Description="Manufacturer URL", ComponentLink1URL=http://www.ti.com/, ComponentLink2Description=Datasheet, ComponentLink2URL=http://www.ti.com/general/docs/lit/getliterature.tsp?genericPartNumber=TPS73233&fileType=pdf, ComponentLink3Description="Package Specification", ComponentLink3URL=http://www.ti.com/litv/pdf/mpds018i, DatasheetVersion=SBVS037O, Eco-Plan="Green (RoHS & no Sb/Br)", Fixed Output Options(V)=3.3, Iout(Max)(A)=0.25, Iq(Typ)(mA)=0.4, Mounting Technology="Surface Mount", PackageDescription="5-Pin Plastic Small Outline, Body 1.60 Af— 2.90 mm, Pitch 0.95 mm", PackageReference=DBV0005A, PackageVersion=4073253-4/K, PartNumber=TPS73233DBVT, SubFamily="Single Channel LDO", Vdo(Typ)(mV)=40, Vin(Max)(V)=5.5, Vin(Min)(V)=1.7, Vout Adj(Max)(V)=3.3, Vout Adj(Min)(V)=3.3
U9: library part CMP-0152-00063-1, "2-Wire I2C-Compatible Serial EEPROM, 1.7 to 3.6 V, -40 to 85 degC, 8-Pin SOIC (S1), RoHS, Tape and Reel", Generic Part Number=AT24C32E, Supply Current Max="1 mA", Temperature Max="85 degC", Temperature Min="-40 degC", Voltage Supply Max="3.6 V", Voltage Supply Min="1.7 V", Code_JEDEC=MS-012, ComponentLink1Description="Manufacturer URL", ComponentLink1URL=http://www.atmel.com/, ComponentLink2Description=Datasheet, ComponentLink2URL=http://www.atmel.com/Images/Atmel-8905-SEEPROM-AT24C32E-Datasheet.pdf, DatasheetVersion="Rev. 8905E", Memory Size="0.032 Mbits", Mounting Technology="Surface Mount", PackageDescription="8-Pin Small Outline Package, Body 4.9 x 3.9 mm, Pitch 1.27 mm", PackageVersion="Rev. H, 03/2015", Packing="Tape and Reel", Part Number=AT24C32E, PartNumber=AT24C32E-SSHM-T, RoHS=TRUE
Y1: library part CMP-2000-05724-1, "HC / 49 US (AT49) Low Profile Crystal, 11.0592 MHz, 0 to 70 degC, 2-Pin SMD, RoHS, Tape and Reel", Case Height=4.2mm, Case Length=11.4mm, Case Width=4.7mm, Frequency=11.0592MHz, Frequency Stability=50PPM, Load Capacitance=18pF, Manufacturer=ABRACON, Operating Temperature Range=-20Cto+70C, Package / Case=HC-49/US, Package Description="2-Pin Surface Mount Device, Body 11.4 x 4.7 mm", Tolerance=20PPM, Brand=ABRACON, Datasheet URL=http://www.mouser.com/ds/2/3/abls-44621.pdf, Datasheet Version=04/2011, Dimensions=4.7mmWx11.4mmLx4.2mmH, ESR=50Ohms, Factory Pack Quantity=1000, Manufacturer URL=http://www.abracon.com/, Mounting Style=SMD/SMT, Mounting Technology=SurfaceMount, Package Reference=ABLS-11.0592MHZ-B2-T, Packaging=Reel, Product Category=Crystals, RoHS=Details, Series=ABLS, Termination Style=SMD/SMT, Type=LowProfileMicroprocessorCrystal

## Via types
v1: diameter 0.8, hole 0.4, L1 to L2, 3 vias
v2: diameter 1.27, hole 0.711, L1 to L2, 2 vias

## Nets (pads, with @x,y where several pads share a name; then routed paths per layer and width w, separated by ;. In a path a pad name is that pad's centre, name@x,y a point inside that pad or via, vN(x,y) a via of type N, cw(c..) or ccw(c..) an arc to the next point about the centre after c; other vN are vias at no path point)
328P_RESETn: D6.2 J4.5 R9.2 SW1.1 SW1.2 U1.1 | length 102.9
  L1 w0.2: R9.2 4.945,35.755 5.6,35.1 5.6,27.4 8.2,24.8 U1.1@21.1,24.8 ; SW1.2@4.169,37.931 SW1.1 2.573,36.027 2.6,36 R9.2@4.2,36 ; SW1.2 33.131,37.931 v1(33.2,38)
  L2 w0.2: v1(33.2,38) 63.3,38 68.2,42.9 72.3,42.9 J4.5@73.4,41.8
+3V3: C16.2 C18.2 D6.1 FB2.1 FB3.1 J2.8 J3.1 J4.2 R8.1 R9.1 R10.1 R14.2 R15.1 R16.2 SW2.1 SW2.6 U9.8 | length 203.7
  L1 w0.4: SW2.1 1.3,17 1.3,33.9 ; R9.1 3.655,34.155 3.4,33.9 1.3,33.9 ; J3.1@23,48.2 23,44.2 ; FB3.1@43.1,36.8 v1(43.1,39.2) ; J2.8@65.855,17.655 67,18.8 67,30.1 70.86,33.96 J4.2 67.7,36.5 65,39.2 v1(43.1,39.2) ; 1.3,33.9 1.3,39 2.1,39.8 18.6,39.8 23,44.2 ; 23,44.2 28,39.2 v1(43.1,39.2)
  L2 w0.4: SW2.1 SW2.6 6.1,15.5 9.1,18.5 20.6,18.5 27.7,11.4 31.7,11.4 33.2,12.9 FB2.1@33.2,15.1 ; J3.1@23,48.4 J3.1 23,45.7 23.9,44.8 32.3,44.8 33.305,45.805 U9.8 ; v1(43.1,39.2) 50.5,39.2 54.2,42.9 R14.2 R16.2
+3V3_328P_AVCC: C22.2 C23.2 FB3.2 U1.20 | length 6.4
  L1 w0.4: C22.2 C23.2 43,35 FB3.2 ; C23.2@41.3,34.9 41.31,34.89 U1.20
+3V3_328P_VCC: C19.2 C20.2 FB2.2 U1.7 | length 13.6
  L2 w0.4: C19.2@35.6,16.9 33.2,16.9 33.2,21.76 U1.7 ; C19.2@35.9,16.9 C20.2
+3V3_SW: C14.1 SW2.2 SW2.5 U7.5 | length 42.5
  L2 w0.4: SW2.2@2.7,13 SW2.2 SW2.5 ; SW2.5@6,12.9 7.1,12.9 8.2,11.8 8.2,10.4 9.1,9.5 17.4,9.5 18,8.9 24.3,8.9 25.8,10.4 31.9,10.4 34.5,13 37,13 37.65,12.35 U7.5 C14.1@40.025,11.575
+AREF: C24.2 U1.21 | length 3.3
  L1 w0.4: C24.2@37.2,35 37.2,34 U1.21@38.8,32.4
+VIN: C15.1 J1.1 LED3.1 U4.4 | length 40.3
  L1 w0.4: LED3.1 J1.1@73.05,9.55
  L2 w0.4: U4.4 C15.1@39.75,5.9 ; C15.1 55.3,5.9 59,9.6 J1.1 J1.1@73.3,9.6
AD0: U1.23
AD1: U1.24
AD2: R2.2 R3.1 U1.25 | length 12.7
  L2 w0.2: U1.25 28.61,28.19 30,26.8 30,22.6 30.5,22.1 30.3,21.9 R2.2@29,21.9
AD3: U1.26
AD4/SDA: J3.2 R8.2 U1.27 U9.5 | length 48.7
  L2 w0.2: U1.27@23.6,32.3 23.6,37.1 28.5,42 U9.5@38.7,42 ; R8.2 J3.2@25.5,48.2 ; J3.2 27.34,50.1 39.466,50.1 42,47.566 42,43.7 40.4,42.1 U9.5@39.766,42.1
AD5/SCL: J3.3 R10.2 U1.28 U9.6 | length 47.5
  L2 w0.2: U1.28@21,32.5 21,36.6 27.665,43.265 U9.6@39,43.265 ; R10.2 J3.3@28.1,48.2 ; J3.3@28.2,48.6 29.3,49.7 34.166,49.7 39.3,49.7 41.6,47.4 41.6,44.5 40.3,43.2 U9.6@39,43.2
GND: BH2+.1 BH2+.2 BH2+.3 C13.2 C14.2 C15.2 C16.1 C18.1 C19.1 C20.1 C21.1 C22.1 C23.1 C24.1 C25.1 J1.4 J2.6 J3.5 J4.6 LED1.2 LED2.2 LS1.2 R2.1 R11.2 R12.1 R18.2 SW1.3 SW1.4 SW2.3 SW2.4 U1.8 U1.22 U4.2 U7.2 U9.4 U9.7
  other v2: 47,43.1 47,47
IO0: R1.2 U1.2 | length 51.3
  L1 w0.2: U1.2 23.53,20.97 29,15.5 58.6,15.5 59.7,14.4 R1.2@68.3,14.4
IO1: R4.2 U1.3 | length 48.9
  L1 w0.2: U1.3@26.1,24.8 26.1,19.5 29.539,16.061 R4.2
IO2: R5.2 U1.4 | length 13.3
  L2 w0.2: R5.2@16.6,21.7 25.52,21.7 U1.4
IO3: U1.5
IO4: U1.6
IO5: U1.11
IO6: R7.2 U1.12 | length 21
  L2 w0.2: U1.12@49,24.7 50.2,23.5 68.1,23.5 R7.2
IO7: U1.13
IO8: R6.1 U1.14 | length 15.9
  L2 w0.2: U1.14@53.9,24.8 55.3,26.2 68.8,26.2 R6.1
IO9: J2.7 U1.15 | length 20.5
  L1 w0.2: U1.15@54,32.4 56.5,32.4 58.1,30.8 58.1,23.9 62.2,19.8 J2.7@65.2,19.8
MISO: J2.4 J4.1 U1.18 | length 33.2
  L2 w0.2: U1.18@46.3,32.5 51.3,27.5 65.3,27.5 73.4,35.6 J4.1@73.4,36.3
MOSI: J2.3 J4.4 U1.17 | length 28.8
  L2 w0.2: U1.17@48.9,32.4 51.3,30 65.2,30 69.5,34.3 69.5,37.9 70.64,39.04 J4.4
NetC21_2: C21.2 U1.10 Y1.1 | length 6.8
  L2 w0.2: U1.10@43.8,24.8 44.6,24 C21.2
NetC25_2: C25.2 U1.9 Y1.2 | length 7
  L2 w0.2: C25.2 40.3,23.8 41.3,24.8 U1.9@41.3,24.7
NetJ1_2: J1.2 R1.1 | length 4.2
  L1 w0.2: R1.1 70.666,14.534 J1.2@73.2,12
NetJ1_3: J1.3 R4.1 | length 3.7
  L1 w0.2: R4.1 71.639,16.061 J1.3@73.1,14.6
NetLED1_1: LED1.1 R6.2 | length 2.5
  L2 w0.2: R6.2 LED1.1@70.9,29
NetLED2_1: LED2.1 R7.1 | length 2.5
  L2 w0.2: LED2.1@70.9,22 R7.1
NetLED3_2: LED3.2 R17.1 | length 2
  L1 w0.2: LED3.2@70.072,11.028 R17.1
NetLS1_1: LS1.1 R5.1 | length 7.3
  L2 w0.2: LS1.1@7.3,21.7 R5.1
NetR11_1: R11.1 R14.1 U9.3 | length 11.4
  L2 w0.2: U9.3@44.3,43.2 45.4,43.2 45.8,42.8 45.8,41.9 46.7,41 48.7,41 51,43.3 R11.1 R14.1
NetR12_2: R12.2 R15.2 U9.2 | length 8.8
  L2 w0.2: U9.2@44.3,44.5 45.2,44.5 45.6,44.9 50.2,44.9 51.1,45.8 R15.2
NetR16_1: R16.1 R18.1 U9.1 | length 11.9
  L2 w0.2: U9.1@44.4,45.6 U9.1 44.4,47.9 45.4,48.9 50.6,48.9 51,48.5 R18.1 ; R18.1@51.1,47.6 R16.1
NetR17_2: R17.2 U4.3 | length 35.8
  L1 w0.2: v1(68.3,11.2) R17.2@68.3,13
  L2 w0.2: U4.3 37.65,7.05 38,7.4 43.3,7.4 44.3,6.4 55.093,6.4 59.893,11.2 v1(68.3,11.2)
SCK: J2.2 J4.3 R13.2 | length 35.8
  L1 w0.2: R13.2 60.7,36.8 J2.2@65,32.5
  L2 w0.2: J2.2@65.2,32.4 69,36.2 69,39.7 69.7,40.4 72,40.4 73.36,39.04 J4.3
SCK_R: R13.1 U1.19 | length 3.3
  L1 w0.2: U1.19@43.8,32.2 45.1,33.5 R13.1
SS: J2.1 U1.16 | length 14.8
  L2 w0.2: U1.16@51.4,32.5 54,35.1 J2.1@65.1,35.1
VBLION: BH2-.1 BH2-.2 BH2-.3 C13.1 R3.2 U4.5 U7.1 U7.3 | length 35.8
  L1 w0.4: BH2-.3 27.9,11 ; BH2-.1@30.4,13.5 27.9,11 ; BH2-.2@30.6,8.3 27.9,11
  L2 w0.4: BH2-.2 32.75,8.45 ; BH2-.1@30.6,13.6 R3.2 ; C13.1@32.8,5.6 32.8,9.1 33.9,10.2 35.7,10.2 ; C13.1@33.65,5.9 U4.5 ; U7.3@35.7,8.8 35.7,10.2 ; U7.1 37.65,9.85 37.3,10.2 35.7,10.2
pads on no net: J2.5 J3.4 MH1.MOUNT MH2.MOUNT MH3.MOUNT MH4.MOUNT MH6.MOUNT U4.1 U7.4

## Polygon pours and split planes (outlines as drawn)
GND on L1 "NONET_L01_P002" (solid, remove dead copper, shelved, pour order 2): 6.906,51 68.906,51 68.906,44 75.906,44 75.906,6.999 68.906,6.999 68.906,-0.001 6.906,-0.001 6.906,6.999 -0.094,6.999 -0.094,44 6.906,44 6.906,48.249
GND on L2 "NONET_L02_P000" (solid, remove dead copper, shelved, pour order 0): 7,51 69,51 69,44 76,44 76,7 69,7 69,0 7,0 7,7 0,7 0,44 7,44 7,48.25

## Keep-outs
Keep-Out Layer:
  the board outline again, w1.2

## Silkscreen, mask and mechanical layers (free items; w line width, h text height)
Top Overlay:
  drawing of 4 lines, arcs and shapes, not listed
  text "RESET" at 7.1,35.4 h1.52 r90
  text "ACT" at 69,29.8 h1.52 r90
  text "B" at 69.4,20.2 h1.52 r90
  text "+" at 20,16.8 h3
  text "OTimCon-Board ver. 0.2" at 19.7,2.4 h1.52

## Dimensions
0,7 to 76,7 on Mechanical 16
7,51 to 7,0 on Mechanical 16